# EAGLE board circuito_tesi (EAGLE 9.6.2)
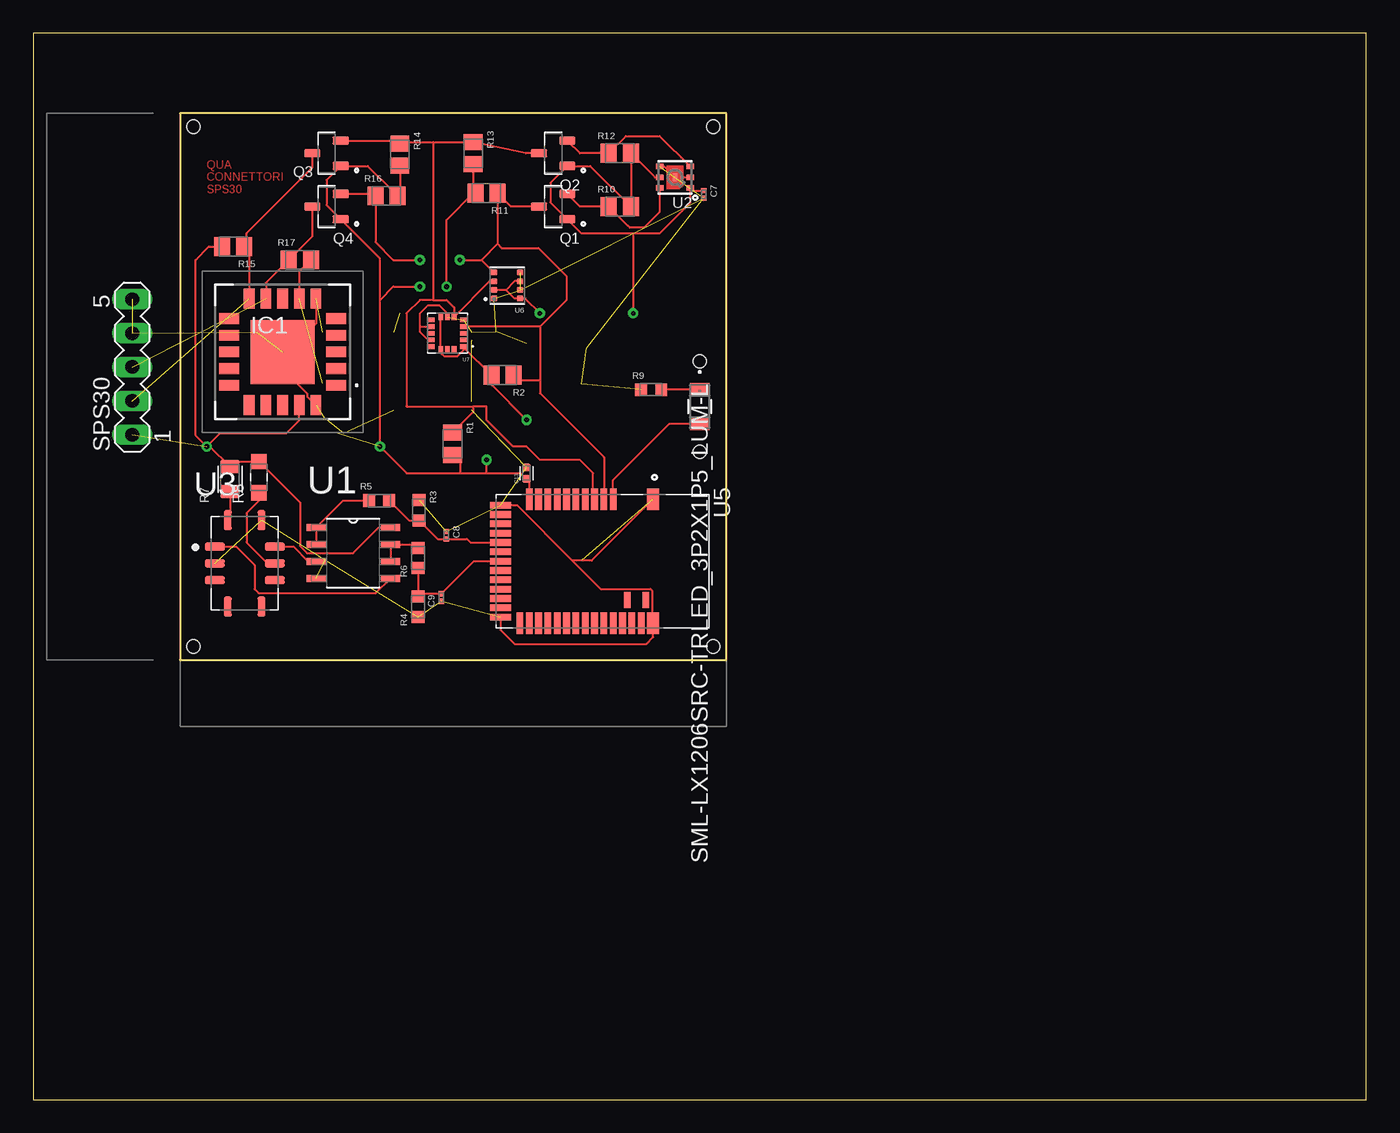
[diagram p0: board, top side]
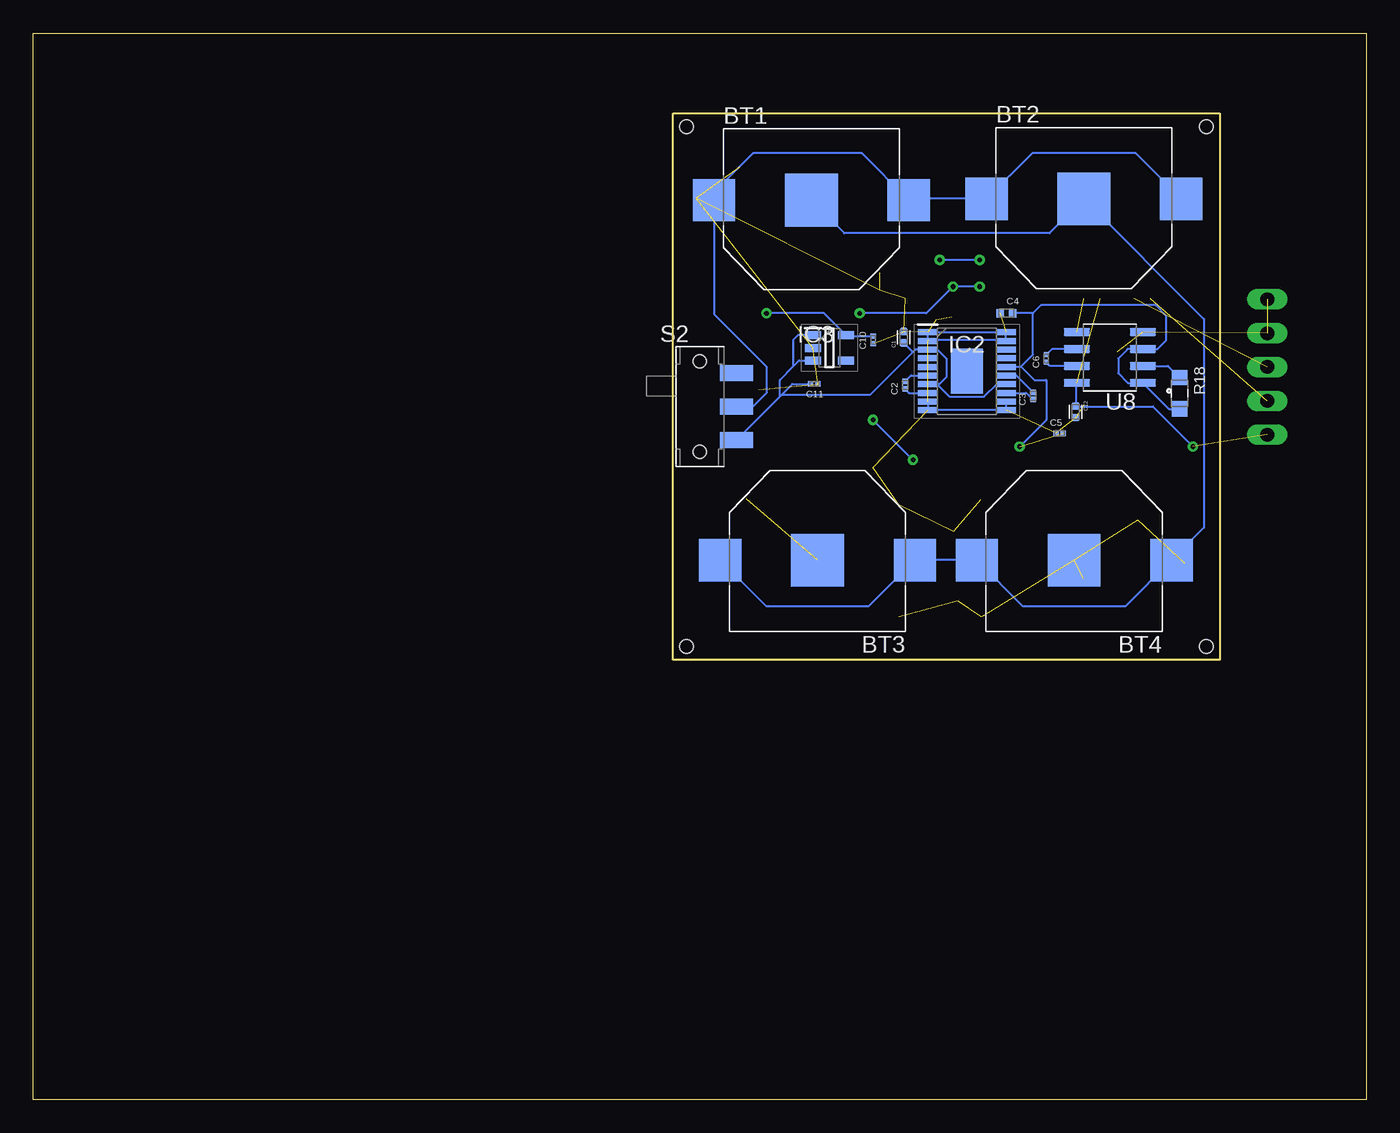
[diagram p1: board, bottom side, seen from below]

Size 100 x 80 mm. Coordinates in mm from the lower left corner, seen from the top.
Outline: 0,0 100,0 100,80 0,80 0,0
Outline: 11,74 11,33 52,33 52,74 11,74
Copper layers (1*16): Top 0.035mm / dielectric 1.5mm / Bottom 0.035mm
Design rules "default": minimum track width 6mil, minimum drill 0.35mm, track to track 6mil, track to pad 6mil, pad to pad 6mil, via to via 6mil, smd to smd 6mil, copper to edge 40mil, drill to drill 6mil, minimum pad ring 10mil, minimum via ring 8mil, stop-mask expansion 4mil, vias tented up to drill 0mil, thermal gap 10mil
Holes 1 mm at 51,34 51,73 12,73 12,34

## Footprints (pad centres in the part's own frame; a part is rotated, then mirrored left to right if it is on the bottom)
BAT_2996TR = smd 3.96 x 3.96: - 0,0 | smd 3.18 x 3.18: S+1 -7.3,0; S+2 7.3,0
CAPC1005X55N = smd 0.54 x 0.6: 1 -0.43,0; 2 0.43,0
CAPC0603X39N = smd 0.41 x 0.42: 1 -0.278,0; 2 0.278,0
CAPC1005X55N' = smd 0.55 x 0.64: 1 -0.465,0; 2 0.465,0
CAPC0603X35N = smd 0.38 x 0.4: 1 -0.28,0; 2 0.28,0
CAPC0603X33N = smd 0.38 x 0.4: 1 -0.281,0; 2 0.281,0
SCD41DR2 = smd 1.5 x 0.8: 1 -4,2.5; 2 -4,1.25; 3 -4,0; 4 -4,-1.25; 5 -4,-2.5; 11 4,-2.5; 12 4,-1.25; 13 4,0; 14 4,1.25; 15 4,2.5 | smd 0.8 x 1.5: 6 -2.5,-4; 7 -1.25,-4; 8 0,-4; 9 1.25,-4; 10 2.5,-4; 16 2.5,4; 17 1.25,4; 18 0,4; 19 -1.25,4; 20 -2.5,4 | smd 4.8 x 4.8: 21 0,0
SOP65P640X120-21N = smd 1.475 x 0.45: 1 -2.938,2.925; 2 -2.938,2.275; 3 -2.938,1.625; 4 -2.938,0.975; 5 -2.938,0.325; 6 -2.938,-0.325; 7 -2.938,-0.975; 8 -2.938,-1.625; 9 -2.938,-2.275; 10 -2.938,-2.925; 11 2.938,-2.925; 12 2.938,-2.275; 13 2.938,-1.625; 14 2.938,-0.975; 15 2.938,-0.325; 16 2.938,0.325; 17 2.938,0.975; 18 2.938,1.625; 19 2.938,2.275; 20 2.938,2.925 | smd 2.4 x 3.38: 21 0,0
SOT95P280X145-5N = smd 1.2 x 0.6: 1 -1.25,0.95; 2 -1.25,0; 3 -1.25,-0.95; 4 1.25,-0.95; 5 1.25,0.95
LED_3P2X1P5_LUM-L = smd 0.94 x 1.448: 1 -1.283,0; 2 1.283,0
SOT95P240X111-3N = smd 1.23 x 0.6: 1 -1.06,0.95; 2 -1.06,-0.95; 3 1.06,0
RESC2012X60N = smd 1.2 x 1.42: 1 -0.835,0; 2 0.835,0
RESC1508X55N = smd 0.9 x 0.97: 1 -0.76,0; 2 0.76,0
RESC2012X65N = smd 1 x 1.42: 1 -0.935,0; 2 0.935,0
RES_ERA6VEB8200V = smd 1.15 x 1.15: 1 -1.175,0; 2 1.175,0
RESC1508X55N' = smd 0.87 x 0.93: 1 -0.755,0; 2 0.755,0
SW_JS102011SAQN = smd 1.2 x 2.5: 1 -2.5,2.75; 2 0,2.75; 3 2.5,2.75 | hole 1: -3.4,0; 3.4,0
MA05-1 = drill 1.016 long: 1 -5.08,0; 2 -2.54,0; 3 0,0; 4 2.54,0; 5 5.08,0
SOIC127P600X175-8N = smd 1.422 x 0.533: 1 -2.794,1.905; 2 -2.794,0.635; 3 -2.794,-0.635; 4 -2.794,-1.905; 5 2.794,-1.905; 6 2.794,-0.635; 7 2.794,0.635; 8 2.794,1.905
SGP30 = smd 0.55 x 0.4: 1 -1.15,0.8; 2 -1.15,0; 3 -1.15,-0.8; 4 1.15,-0.8; 5 1.15,0; 6 1.15,0.8 | smd 0.305 x 0.61: DIEPAD 0,0
SENSOR_MICS-6814 = smd 1.5 x 0.6: A -2.25,1.25; B -2.25,0; C -2.25,-1.25; F 2.25,-1.25; G 2.25,0; H 2.25,1.25 | smd 0.6 x 1.5: D -1.27,-3.25; E 1.27,-3.25; J 1.27,3.25; K -1.27,3.25
XCVR_317030213 = smd 1.6 x 0.9: 1 -4.65,3.8; 39 4.65,3.8 | smd 1.6 x 0.5: 2 -4.65,0.8; 3 -4.65,0.1; 4 -4.65,-0.6; 5 -4.65,-1.3; 6 -4.65,-2; 7 -4.65,-2.7; 8 -4.65,-3.4; 9 -4.65,-4.1; 10 -4.65,-4.8; 11 -4.65,-5.5; 25 4.65,-6.2; 26 4.65,-5.5; 27 4.65,-4.8; 28 4.65,-4.1; 29 4.65,-3.4; 30 4.65,-2.7; 31 4.65,-2; 32 4.65,-1.3; 33 4.65,-0.6; 34 4.65,0.1; 35 4.65,0.8; 36 4.65,1.5; 37 4.65,2.2; 38 4.65,2.9 | smd 0.5 x 1.6: 12 -4.2,-7.65; 13 -3.5,-7.65; 14 -2.8,-7.65; 15 -2.1,-7.65; 16 -1.4,-7.65; 17 -0.7,-7.65; 18 0,-7.65; 19 0.7,-7.65; 20 1.4,-7.65; 21 2.1,-7.65; 22 2.8,-7.65; 23 3.5,-7.65; 24 4.2,-7.65 | smd 1.2 x 0.5: 40 2.9,3.25; 41 2.9,1.85
PSON65P250X250X100-8N = smd 0.49 x 0.45: 1 0.97,0.975; 2 0.97,0.325; 3 0.97,-0.325; 4 0.97,-0.975; 5 -0.97,-0.975; 6 -0.97,-0.325; 7 -0.97,0.325; 8 -0.97,0.975
PQFN50P300X300X100-16N = smd 0.52 x 0.35: 1 -1.225,1; 2 -1.225,0.5; 3 -1.225,0; 4 -1.225,-0.5; 5 -1.225,-1; 9 1.225,-1; 10 1.225,-0.5; 11 1.225,0; 12 1.225,0.5; 13 1.225,1 | smd 0.35 x 0.52: 6 -0.5,-1.225; 7 0,-1.225; 8 0.5,-1.225; 14 0.5,1.225; 15 0,1.225; 16 -0.5,1.225
SOIC127P600X175-8N' = smd 1.97 x 0.59: 1 -2.475,1.905; 2 -2.475,0.635; 3 -2.475,-0.635; 4 -2.475,-1.905; 5 2.475,-1.905; 6 2.475,-0.635; 7 2.475,0.635; 8 2.475,1.905

## Placement (x,y rotation side)
BT1  2996TR  [BAT_2996TR]  41.63,67.48 0 bottom
BT2  2996TR  [BAT_2996TR]  21.18,67.58 0 bottom
BT3  2996TR  [BAT_2996TR]  41.16,40.47 180 bottom
BT4  2996TR  [BAT_2996TR]  21.91,40.47 180 bottom
C1  CL05A106MP5NUNC  [CAPC1005X55N]  34.7,57.2 90 bottom
C2  GRM033R61A225KE47D  [CAPC0603X39N]  34.6,53.6 90 bottom
C3  GRM033R61A225KE47D  [CAPC0603X39N]  25,52.8 90 bottom
C4  CL05A226MQ5N6J8  [CAPC1005X55N']  27,59 0 bottom
C5  GRM033R61A225KE47D  [CAPC0603X39N]  23,50 0 bottom
C6  GRM033R60J105MEA2D  [CAPC0603X35N]  24,55.6 90 bottom
C7  GRM033C80J104KE15D  [CAPC0603X33N]  50.29,67.92 270 top
C8  GRM033R60J103KA01D  [CAPC0603X33N]  30.98,42.34 270 top
C9  GRM033R60J103KA01D  [CAPC0603X33N]  30.62,37.67 90 top
C10  GRM033R60J105MEA2D  [CAPC0603X35N]  37,57 90 bottom
C11  GRM033R60J105MEA2D  [CAPC0603X35N]  41.4,53.7 180 bottom
C12  CL05A106MP5NUNC  [CAPC1005X55N]  21.8,51.6 270 bottom
C13  CL05A106MP5NUNC  [CAPC1005X55N]  37,47 90 top
IC1  SCD41-D-R2  [SCD41DR2]  18.7,56.09 180 top
IC2  TPS60120PWPR  [SOP65P640X120-21N]  29.96,54.65 0 bottom
IC3  TPS78918DBVR  [SOT95P280X145-5N]  40.27,56.4 0 bottom
LED2  SML-LX1206SRC-TRLED_3P2X1P5_LUM-L  [LED_3P2X1P5_LUM-L]  50,52 270 top
Q1  BSS138  [SOT95P240X111-3N]  39,67 180 top
Q2  BSS138  [SOT95P240X111-3N]  39,71 180 top
Q3  BSS138  [SOT95P240X111-3N]  22,71 180 top
Q4  BSS138  [SOT95P240X111-3N]  22,67 180 top
R1  RNCP0805FTD10K0  [RESC2012X60N]  31.46,49.2 270 top
R2  RNCP0805FTD10K0  [RESC2012X60N]  35.2,54.35 180 top
R3  RMCF0603FT10M0  [RESC1508X55N]  28.93,44.21 270 top
R4  RMCF0603FT10M0  [RESC1508X55N]  28.87,36.97 90 top
R5  RMCF0603FT5M10  [RESC1508X55N]  25.95,44.93 0 top
R6  RMCF0603FT5M10  [RESC1508X55N]  28.87,40.63 90 top
R7  RP73PF2A130RBTDF  [RESC2012X65N]  14.76,46.55 90 top
R8  ERA6VEB8200V  [RES_ERA6VEB8200V]  16.93,46.7 90 top
R9  RNCF0603DTE820R  [RESC1508X55N']  46.35,53.26 0 top
R10  RNCP0805FTD10K0  [RESC2012X60N]  44,67 0 top
R11  RNCP0805FTD10K0  [RESC2012X60N]  34,68 180 top
R12  RNCP0805FTD10K0  [RESC2012X60N]  44,71 0 top
R13  RNCP0805FTD10K0  [RESC2012X60N]  33,71 270 top
R14  RNCP0805FTD10K0  [RESC2012X60N]  27.5,70.9 270 top
R15  RNCP0805FTD10K0  [RESC2012X60N]  15,64 180 top
R16  RNCP0805FTD10K0  [RESC2012X60N]  26.5,67.8 0 top
R17  RNCP0805FTD10K0  [RESC2012X60N]  20,63 0 top
R18  ERA6VEB8200V  [RES_ERA6VEB8200V]  14,53 270 bottom
S2  JS102011SAQN  [SW_JS102011SAQN]  50,52 270 bottom
SPS30  [MA05-1]  7.42,54.96 90 top
U1  TSV912IDT  [SOIC127P600X175-8N]  24,41 0 top
U2  SGP30  [SGP30]  48.14,69.2 180 top
U3  MICS-6814  [SENSOR_MICS-6814]  15.86,40.23 0 top
U5  317030213  [XCVR_317030213]  42.7,40.39 270 top
U6  BME280  [PSON65P250X250X100-8N]  35.55,61.07 180 top
U7  LIS3DH  [PQFN50P300X300X100-16N]  31.07,57.5 180 top
U8  MAX682ESA+  [SOIC127P600X175-8N']  19.23,55.68 180 bottom

## Library data of the parts
BT1-BT4 = Battery_holder; DESCRIPTION: SMT Holder for 11.6mm Cell-Tin Nickel Plated on T&R; DIGI-KEY_PART_NUMBER: 36-2996TR-ND; MF: Keystone Electronics; MP: 2996TR; PACKAGE: None; PURCHASE-URL: https://pricing.snapeda.com/search/part/2996TR/?ref=eda
C1 C12 C13 = Condens_10uF; DESCRIPTION: 10 µF ±20% 10V Ceramic Capacitor X5R 0402 (1005 Metric); DIGI-KEY_PART_NUMBER: 1276-1450-2-ND; MF: Samsung; MP: CL05A106MP5NUNC; PACKAGE: 0402 Samsung; PURCHASE-URL: https://pricing.snapeda.com/search/part/CL05A106MP5NUNC/?ref=eda
C2 C3 C5 = Condens_2.2uF; DESCRIPTION: 2.2 µF ±10% 10V Ceramic Capacitor X5R 0201 (0603 Metric); DIGI-KEY_PART_NUMBER: 490-13227-2-ND; MF: Murata Electronics; MP: GRM033R61A225KE47D; PACKAGE: None; PURCHASE-URL: https://pricing.snapeda.com/search/part/GRM033R61A225KE47D/?ref=eda
C4 = Condens_22uF; DESCRIPTION: 22 µF ±20% 6.3V Ceramic Capacitor X5R 0402 (1005 Metric); DIGI-KEY_PART_NUMBER: 1276-7090-2-ND; MF: Samsung Electro-Mechanics; MP: CL05A226MQ5N6J8; PACKAGE: 0402 Samsung Electro-Mechanics; PURCHASE-URL: https://pricing.snapeda.com/search/part/CL05A226MQ5N6J8/?ref=eda
C6 C10 C11 = Condens_1uF; DESCRIPTION: SMD capacitor X5R(EIA) with capacitance 1.0uF Tol.20%. Rated voltage 6.3Vdc 85C; DIGI-KEY_PART_NUMBER: 490-7229-2-ND; MF: Murata; MP: GRM033R60J105MEA2D; PACKAGE: 0603 Taiyo Yuden; PURCHASE-URL: https://pricing.snapeda.com/search/part/GRM033R60J105MEA2D/?ref=eda
C7 = Condens_100nF; DESCRIPTION: SMD capacitor X6S(EIA) with capacitance 0.10uF Tol.10%. Rated voltage 6.3Vdc 105C; DIGI-KEY_PART_NUMBER: 490-10390-2-ND; MF: Murata Electronics; MP: GRM033C80J104KE15D; PACKAGE: 0603 Taiyo Yuden; PURCHASE-URL: https://pricing.snapeda.com/search/part/GRM033C80J104KE15D/?ref=eda
C8 C9 = Condens_10nF; DESCRIPTION: SMD capacitor X5R(EIA) with capacitance 10000pF Tol.10%. Rated voltage 6.3Vdc 85C; DIGI-KEY_PART_NUMBER: 490-5403-2-ND; MF: Murata; MP: GRM033R60J103KA01D; PACKAGE: 0603 Taiyo Yuden; PURCHASE-URL: https://pricing.snapeda.com/search/part/GRM033R60J103KA01D/?ref=eda
IC1 = SCD41-R2_unofficial; ARROW_PART_NUMBER: SCD41-D-R2; ARROW_PRICE-STOCK: https://www.arrow.com/en/products/scd41-d-r2/sensirion-ag?region=nac; DESCRIPTION: Air Quality Sensor CO2 Sensor 2.5V/3.3V/5V 20-Pin SMD EP; HEIGHT: 6.8mm; MANUFACTURER_NAME: Sensirion; MANUFACTURER_PART_NUMBER: SCD41-D-R2; MOUSER_PART_NUMBER: 403-SCD41-D-R2; MOUSER_PRICE-STOCK: https://www.mouser.co.uk/ProductDetail/Sensirion/SCD41-D-R2?qs=HBWAp0VN4Ri4o7ei4T3s0g%3D%3D
IC2 = C_P_3.3_TPS60120PWPR; ARROW_PART_NUMBER: TPS60120PWPR; ARROW_PRICE-STOCK: https://www.arrow.com/en/products/tps60120pwpr/texas-instruments; DESCRIPTION: Charge Pump Switching Regulator IC Positive Fixed 3.3V 1 Output 200mA 20-PowerTSSOP (0.173", 4.40mm Width); HEIGHT: 1.2mm; MANUFACTURER_NAME: Texas Instruments; MANUFACTURER_PART_NUMBER: TPS60120PWPR; MOUSER_PART_NUMBER: 595-TPS60120PWPR; MOUSER_PRICE-STOCK: https://www.mouser.co.uk/ProductDetail/Texas-Instruments/TPS60120PWPR?qs=Gse6rAGbi79DzmdCulofrg%3D%3D
IC3 = V_REG_1.8_SOT-23-5; ARROW_PART_NUMBER: TPS78918DBVR; ARROW_PRICE-STOCK: https://www.arrow.com/en/products/tps78918dbvr/texas-instruments; DESCRIPTION: 10-V, 100-mA, Low Iq, Low Noise, Low-Dropout Linear Regulator; HEIGHT: 1.45mm; MANUFACTURER_NAME: Texas Instruments; MANUFACTURER_PART_NUMBER: TPS78918DBVR; MOUSER_PART_NUMBER: 595-TPS78918DBVR; MOUSER_PRICE-STOCK: https://www.mouser.com/Search/Refine.aspx?Keyword=595-TPS78918DBVR
LED2 = LED_SMD; COPYRIGHT: Copyright (C) 2022 Ultra Librarian. All rights reserved.; DIGI-KEY_PART_NUMBER_1: 67-1359-2-ND; DIGI-KEY_PART_NUMBER_2: 67-1359-1-ND; DIGI-KEY_PART_NUMBER_3: 67-1359-6-ND; DIGI-KEY_PART_NUMBER_4: 67-1359-2-NDL; MANUFACTURER_PART_NUMBER: SML-LX1206SRC-TR; MFR_NAME: Lumex
Q1-Q4 = BSS138; DESCRIPTION: N-Channel 50 V 200mA (Ta) 225mW (Ta) Surface Mount SOT-23-3 (TO-236); DIGI-KEY_PART_NUMBER: BSS138TR-ND; MF: ON Semiconductor; MP: BSS138; PACKAGE: SOT-23 ON; PURCHASE-URL: https://pricing.snapeda.com/search/part/BSS138/?ref=eda
R1 R2 R10-R17 = Res_10K_0p25W; DESCRIPTION: 10 kOhms ±1% 0.25W, 1/4W Chip Resistor 0805 (2012 Metric) Anti-Sulfur, Moisture Resistant Thin Film; DIGI-KEY_PART_NUMBER: RNCP0805FTD10K0TR-ND; MF: Stackpole Electronics Inc; MP: RNCP0805FTD10K0; PACKAGE: 2012 Stackpole; PURCHASE-URL: https://pricing.snapeda.com/search/part/RNCP0805FTD10K0/?ref=eda
R3 R4 = Res_10MOHM_2; DESCRIPTION: 10 MOhms ±1% 0.1W, 1/10W Chip Resistor 0603 (1608 Metric) Automotive AEC-Q200 Thick Film; DIGI-KEY_PART_NUMBER: RMCF0603FT10M0TR-ND; MF: Stackpole Electronics Inc; MP: RMCF0603FT10M0; PACKAGE: 1508 Stackpole; PURCHASE-URL: https://pricing.snapeda.com/search/part/RMCF0603FT10M0/?ref=eda
R5 R6 = Res_5.1MOHM; DESCRIPTION: 5.1 MOhms ±1% 0.1W, 1/10W Chip Resistor 0603 (1608 Metric) Automotive AEC-Q200 Thick Film; DIGI-KEY_PART_NUMBER: RMCF0603FT5M10TR-ND; MF: Stackpole Electronics Inc; MP: RMCF0603FT5M10; PACKAGE: 1508 Stackpole; PURCHASE-URL: https://pricing.snapeda.com/search/part/RMCF0603FT5M10/?ref=eda
R7 = Res_130_0p25; DESCRIPTION: Surface Mount Thin Film Resistor, RP73 Series, 130 ohm, 250 mW, - 0.1%, 150 V; MF: TE Connectivity; MP: RP73PF2A130RBTDF; PACKAGE: 0805 TE Connectivity; PURCHASE-URL: https://pricing.snapeda.com/search/part/RP73PF2A130RBTDF/?ref=eda
R8 R18 = Res_820_0p25W; DESCRIPTION: Thin Film Chip Resistors, High Stability and Reliability Type, ERA6V Series, 0.82K Ohm +/-0.1% , 0.25W , 0805 size , chip resistor (2 x 1.25 x 0.55mm); DIGI-KEY_PART_NUMBER: 10-ERA-6VEB8200VTR-ND; MF: Panasonic; MP: ERA6VEB8200V; PACKAGE: 2012-2 Panasonic; PURCHASE-URL: https://pricing.snapeda.com/search/part/ERA6VEB8200V/?ref=eda
R9 = Res_820OHM; DESCRIPTION: 820 ±0.5% 0.1W, 1/10W Chip Resistor 0603 (1608 Metric) Automotive AEC-Q200 Thin Film; DIGI-KEY_PART_NUMBER: RNCF0603DTE820RTR-ND; MF: Stackpole Electronics Inc; MP: RNCF0603DTE820R; PACKAGE: 1508 Stackpole; PURCHASE-URL: https://pricing.snapeda.com/search/part/RNCF0603DTE820R/?ref=eda
S2 = switch_JS102011SAQN; DESCRIPTION: Slide Switch SPDT Surface Mount, Right Angle; DIGI-KEY_PART_NUMBER: 401-1999-2-ND; MF: C&K; MP: JS102011SAQN; PACKAGE: None; PURCHASE-URL: https://pricing.snapeda.com/search/part/JS102011SAQN/?ref=eda
SPS30 = con-lstb; OC_FARNELL: unknown; OC_NEWARK: unknown
U1 = Opamp_SMD; AVAILABILITY: In Stock; DESCRIPTION: General Purpose Amplifier 2 Circuit Rail-to-Rail 8-SOIC; MF: STMicroelectronics; MP: TSV912IDT; PACKAGE: SOIC-8 STMicroelectronics; PRICE: None; PURCHASE-URL: https://pricing.snapeda.com/search/part/TSV912IDT/?ref=eda
U2 = SGP30; AVAILABILITY: In Stock; DESCRIPTION: SGP30, SHTC1 Air Quality, Humidity, Temperature Sensor Arduino Platform Evaluation Expansion Board; MF: Sensirion AG; MP: SGP30; PACKAGE: None; PRICE: None; PURCHASE-URL: https://pricing.snapeda.com/search/part/SGP30/?ref=eda
U3 = MICS-6814; AVAILABILITY: Not in stock; DESCRIPTION: MiCS-6814 Air Quality Sensor mikroBUS™ Click™ Platform Evaluation Expansion Board; MF: MikroElektronika; MP: MICS-6814; PACKAGE: None; PRICE: None
U5 = Raytac_nRF52; DESCRIPTION: Bluetooth Bluetooth v4.2 Transceiver Module 2.4GHz Integrated, Chip Surface Mount; DIGI-KEY_PART_NUMBER: 1597-1434-ND; MF: Seeed Technology; MP: 317030213; PACKAGE: SMD-41 Seeed Studio; PURCHASE-URL: https://pricing.snapeda.com/search/part/317030213/?ref=eda
U6 = BME280; AVAILABILITY: In Stock; DESCRIPTION: Board Mount Humidity Sensors MEMS humidity, pressure and temperature sensor; MF: Bosch; MP: BME280; PACKAGE: LGA-8 Bosch; PRICE: None; PURCHASE-URL: https://pricing.snapeda.com/search/part/BME280/?ref=eda
U7 = LIS3DH; DESCRIPTION: Accelerometer X, Y, Z Axis ±2g, 4g, 8g, 16g 0.5Hz ~ 625Hz 16-LGA (3x3); DIGI-KEY_PART_NUMBER: 497-10610-ND; MF: STMicroelectronics; MP: LIS3DH; PACKAGE: LGA-16 STMicroelectronics; PURCHASE-URL: https://pricing.snapeda.com/search/part/LIS3DH/?ref=eda
U8 = C_P_5_MAX682ESA_; DESCRIPTION: Charge Pump Switching Regulator IC Positive Fixed 5V 1 Output 250mA 8-SOIC (0.154, 3.90mm Width); DIGI-KEY_PART_NUMBER: MAX682ESA+-ND; MF: Maxim Integrated; MP: MAX682ESA+; PACKAGE: SOIC-8 Maxim; PURCHASE-URL: https://pricing.snapeda.com/search/part/MAX682ESA+/?ref=eda

## Nets
1.8V: C7.1 C10.2 IC3.5 Q1.1 Q2.1 R10.2 R12.2 U2.1 U2.5
3.3: C4.2 C5.2 C13.1 IC2.16 Q3.1 Q4.1 R1.2 R2.2 R11.2 R13.2 R14.2 R16.2 R18.2 U5.11 U6.2 U6.6 U6.8 U7.1 U7.8 U7.14 U8.1 U8.3
5V: C12.1 IC1.7 IC1.19 R7.2 R8.2 R15.2 R17.2 SPS30.1 U1.8 U8.8
DCC: U5.10
DEC4: U5.9
GND: BT3.- BT4.- C1.2 C4.1 C5.1 C7.2 C8.1 C9.1 C10.1 C11.1 C12.2 C13.2 IC1.6 IC1.20 IC1.21 IC2.1 IC2.2 IC2.9 IC2.10 IC2.11 IC2.12 IC2.19 IC2.20 IC3.2 R3.1 R4.1 R9.1 SPS30.4 SPS30.5 U1.4 U2.2 U2.4 U2.DIEPAD U3.B U3.J U5.1 U5.12 U5.24 U5.39 U6.1 U6.5 U6.7 U7.5 U7.7 U7.10 U7.12 U8.4 U8.5
N$1: IC1.10 Q3.3 R15.1 SPS30.2
N$2: BT1.S+1 BT1.S+2 BT2.S+1 BT2.S+2 S2.2
N$3: IC1.9 Q4.3 R17.1 SPS30.3
N$4: BT1.- BT2.- BT3.S+1 BT3.S+2 BT4.S+1 BT4.S+2
N$5: R6.2 U1.6 U1.7
N$6: U1.5 U3.A
N$7: C2.2 IC2.6
N$8: R5.1 U1.1 U1.2
N$9: LED2.1 R9.2
N$10: U1.3 U3.H
N$11: R8.1 U3.G
N$12: C2.1 IC2.8
N$13: R7.1 U3.K
N$14: C3.2 IC2.15
N$15: C9.2 R4.2 R6.1 U5.18
N$16: Q2.2 R12.1 U2.3
N$17: C8.2 R3.2 R5.2 U5.16
N$18: C3.1 IC2.13
N$19: IC2.4 IC2.5
N$20: C6.2 U8.6
N$21: LED2.2 U5.2
N$22: C6.1 U8.7
N$23: Q1.2 R10.1 U2.6
N$24: R18.1 U8.2
SCL: Q1.3 Q4.2 R2.1 R11.1 R16.1 U5.3 U6.4 U7.4
SDA: Q2.3 Q3.2 R1.1 R13.1 R14.1 U5.4 U6.3 U7.6
VDD: C1.1 C11.2 IC2.3 IC2.7 IC2.14 IC3.1 IC3.3 S2.3

## Tracks (layer width: path | path; a pad name or v marks a point on that pad's centre or on a via)
1.8V  (via drill 0.35)
  Top 0.152: U2.5 46.63,69.2 R12.2 R10.2 41.78,70.05 Q2.1 38.8,68.79 38.8,67.31 Q1.1 41.11,65 45,65 | 45,65 47,65 49.29,67.29 U2.1 49.49,68.2 C7.1 | 45,65 v45,59
  Bottom 0.152: C10.2 38.95,57.28 IC3.5 40.67,59 v45,59
3.3  (via drill 0.35)  (1 unrouted)
  Top 0.152: 32,47 28,47 v26,49 26,60 | 32,47 34,47 | 34,47 36.57,47 C13.1 37.2,46.37 U5.11 | 26,60 26,63.11 Q4.1 22,67.11 22,69 22.01,69 Q3.1 25.09,70.05 27.07,68.07 | R1.2 32,47.83 32,47 | 27.07,68.07 R16.2 | 35.45,60.74 U6.2 | 35.45,60.74 36.1,60.09 U6.8 36.91,60.09 v38,59 | U6.6 36.1,61.4 35.45,60.74 | 34,47 v34,48 | v37,51 34.37,53.63 R2.2 32.3,56.42 U7.1 32.3,56.24 31.84,55.79 30.8,55.79 30.67,55.92 30.67,56.18 U7.14 U7.8 | R14.2 27.5,68.5 27.07,68.07 | R13.2 33,68.17 33.08,68.08 | 33.08,68.08 R11.2 | 26,60 27,61 v29,61 | v31,61 31,66 33.08,68.08
  Bottom 0.152: IC2.16 27,55 25.9,55 | 25.9,55 25,55.9 25,59 | 25,59 24.4,59.6 15.8,59.6 15,58.8 15,57 15.69,56.31 U8.3 | 16.09,56.31 U8.3 | U8.3 17.89,56.31 18.6,55.6 18.6,54.5 17.88,53.77 U8.1 14.8,51.83 R18.2 | 25,59 C4.2 | 25.9,55 24.9,54 24,54 24,51 v26,49 | v34,48 v37,51 | v29,61 v31,61 33,59 v38,59
5V  (via drill 0.35)  (2 unrouted)
  Top 0.152: v13,49 14,50 19,50 19.95,50.95 IC1.19 | v13,49 12.17,49.83 12.17,63 13.17,64 R15.2 | R17.2 19.95,62.12 IC1.7 | v13,49 13.24,49 R7.2 15.15,47.88 R8.2 20,44.8 20,41.54 20.54,41 24,41 25.91,42.91 U1.8
  Bottom 0.152: U8.8 21.8,53.68 C12.1 21.77,52 16,52 v13,49
GND  (33 unrouted)
  Top 0.152: IC1.21 18.98,56.13 18.98,56 | IC1.20 20.58,52.71 20.58,52.94 18.98,54.53 18.98,56 | IC1.6 21.2,58.22 18.98,56 | 30.97,58.63 U7.7 30.97,58.82 30.97,59.08 30.45,59.6 29.6,59.6 29,59 29,58 | U5.12 36.28,44.59 40.43,40.43 | 40.43,40.43 42.55,38.32 46.3,38.32 46.43,38.19 46.43,35.81 U5.39 46.5,34.7 46,34.2 36.1,34.2 35.05,35.25 U5.24 | U5.1 41.89,40.43 40.43,40.43 | U2.4 47.34,70 U2.DIEPAD U2.2 | U7.12 29.75,57.1 29.49,57.1 29,57.59 29,58 | 29,58 U7.10
  Bottom 0.152: IC2.9 IC2.10 IC2.11 IC2.12 | 27.1,57 32.9,57 | IC2.2 IC2.1 IC2.20 IC2.19
N$1  (1 unrouted)
  Top 0.152: IC1.10 16.2,63.63 R15.1 16,64.17 16,65 20.94,69.94 Q3.3
N$2
  Bottom 0.152: BT2.S+2 17.3,71 25.06,71 BT2.S+1 34.23,67.58 BT1.S+2 37.85,71 46,71 48.93,68.07 BT1.S+1 48.93,58.93 45,55 45,53 46,52 S2.2
N$3  (1 unrouted)
  Top 0.152: IC1.9 17.45,61.28 R17.1 20.94,64.78 Q4.3
N$4
  Bottom 0.152: BT1.- 39.15,65 23.76,65 BT2.- 12.17,58.57 12.17,42.91 BT4.S+1 18.08,37 25.74,37 BT4.S+2 BT3.S+1 37.33,37 45,37 BT3.S+2
N$5
  Top 0.152: U1.6 U1.7 28.62,41.63 R6.2
N$6
  Top 0.152: U3.A 15.22,41.48 16.6,40.1 16.6,38.3 16.9,38 25.7,38 U1.5
N$7
  Bottom 0.152: C2.2 34.15,54.33 IC2.6
N$8
  Top 0.152: U1.2 U1.1 23.23,44.93 R5.1
N$9
  Top 0.152: LED2.1 49.98,53.26 R9.2
N$10
  Top 0.152: U3.H 19.52,41.48 20.64,40.37 U1.3
N$11
  Top 0.152: 17,45.45 R8.1 16.93,44.93 16,44 16,41.8 17.57,40.23 U3.G
N$12
  Bottom 0.152: C2.1 34.3,53.02 IC2.8
N$13
  Top 0.152: R7.1 14.76,43.65 U3.K
N$14
  Bottom 0.152: IC2.15 26.25,54.33 C3.2
N$15
  Top 0.152: R6.1 R4.2 29.09,37.95 C9.2 33.06,40.39 U5.18
N$16
  Top 0.152: Q2.2 41.01,71 R12.1 44.47,72.3 46.99,72.3 U2.3
N$17
  Top 0.152: R5.2 28.19,43.45 R3.2 30.32,42.06 C8.2 32.54,42.06 32.81,41.79 U5.16
N$18
  Bottom 0.152: IC2.13 25.5,53.02 C3.1
N$19
  Bottom 0.152: IC2.5 IC2.4
N$20
  Bottom 0.152: U8.6 23.57,56.31 C6.2
N$21
  Top 0.152: U5.2 43.5,46.5 47.72,50.72 LED2.2
N$22
  Bottom 0.152: U8.7 23.73,55.05 C6.1
N$23
  Top 0.152: Q1.2 41.01,67 R10.1 44.58,65.58 44.77,65.4 45.8,65.4 46.99,66.59 U2.6
N$24
  Bottom 0.152: U8.2 14.87,55.05 R18.1
SCL  (via drill 0.35)
  Top 0.152: Q4.2 25.52,67.95 R16.1 25.66,64.33 27,63 v29,63 | Q1.3 35.84,67 R11.1 34.84,64.21 | v32,63 33.62,63 | 33.62,63 U6.4 | 33.62,63 34.84,64.21 | 34.84,64.21 35.15,63.9 37.9,63.9 40,61.8 40,60 38,58 | 38,58 U7.4 | 38,58 38,54 | 38,54 38,53 42.8,48.2 U5.3 | R2.1 36.38,54 38,54
  Bottom 0.152: v29,63 v32,63
SDA
  Top 0.152: Q3.2 27.26,71.95 R14.1 27.6,71.83 30,71.83 | Q2.3 36.94,71 R13.1 30,71.83 | 33,52 28,52 28,59 29,60 30,60 | 33,52 34,52 34,51 36,49 37,49 38,48 41,48 42,47 42,45.14 U5.4 | 33,52 33,51.58 R1.1 | 30,71.83 30,60 | 30,60 31,60 31.57,59.43 U7.6 34.24,61.4 U6.3
VDD
  Bottom 0.152: S2.3 44,52.75 | 44,52.75 44,54 43,55 | 43,55 42.55,55.45 IC3.3 | 44,52.75 43.88,52.88 | 43.88,52.88 43.05,53.7 C11.2 | IC3.1 42.65,57.35 43,57 43,55 | 43.88,52.88 37.23,52.88 34.05,56.05 | 34.05,56.05 33.83,56.27 IC2.3 32.17,56.27 31.5,55.6 31.5,54.2 32.02,53.67 IC2.7 32.2,53.67 31.25,52.73 28.66,52.73 27.72,53.67 IC2.14 | 34.05,56.05 34.05,56.12 C1.1

## Text on the board
Top: QUA / CONNETTORI / SPS30